# Altium PCB Pneumatics Control Board.PcbDoc
Units mil, origin at the board's own origin, x right, y up, seen from the top; angles counter-clockwise.
Board outline 6000 x 4000 mil, 2 copper layers (Top Layer, Bottom Layer); 14 components, 38 nets, 49 pads, 0 vias.
Unrouted connection lines stored in the file: 11.
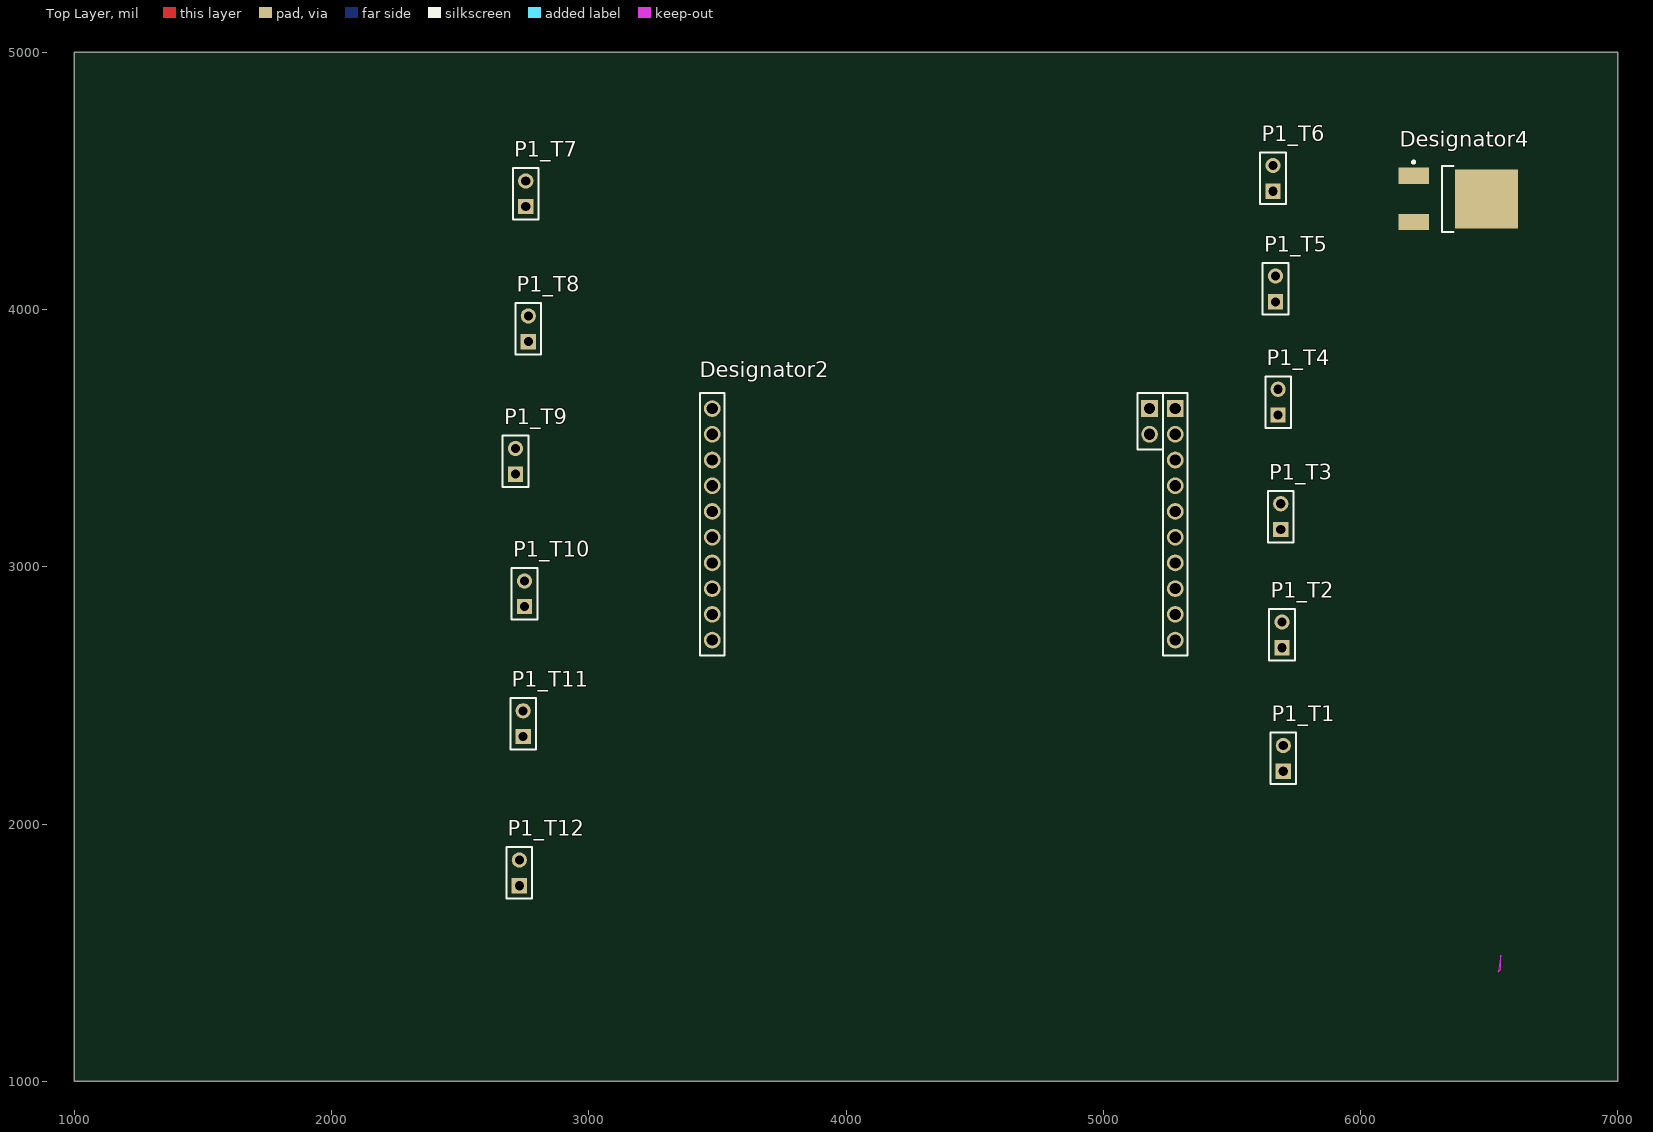
[diagram p0: Top Layer view]
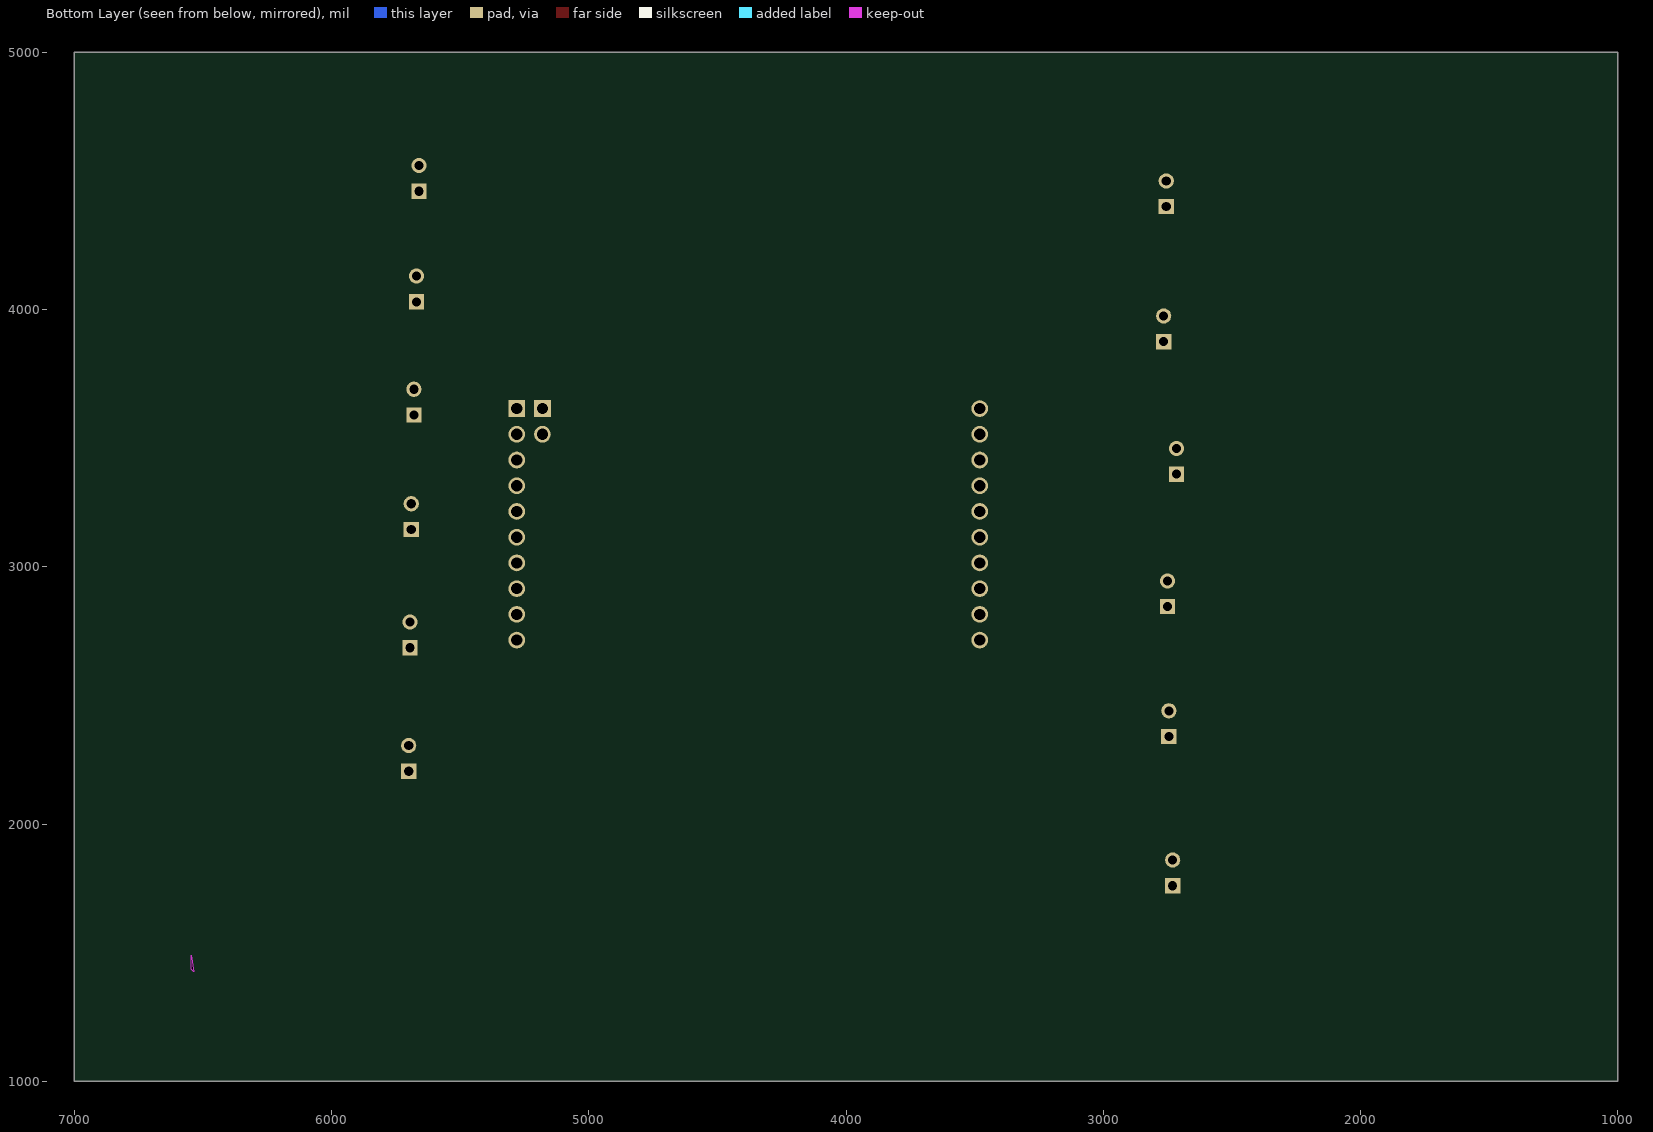
[diagram p1: Bottom Layer view, seen from below]

## Layer stack, top to bottom
Top Solder: solder mask 0.4, Solder Resist, Dk 3.5
Top Layer: signal copper 1.4
Dielectric 1: dielectric 12.6, FR-4, Dk 4.8
Bottom Layer: signal copper 1.4
Bottom Solder: solder mask 0.4, Solder Resist, Dk 3.5

## Board outline
1000,1000 7000,1000 7000,5000 1000,5000
cut-out: 6535,1425 6545,1435 6545,1490

## Design rules (kind name [scope] priority, off if disabled: settings)
Clearance [All] p1: gap=10 ignorepadtopadclearanceinfootprint=FALSE except(0: Arc-Hole Track-Hole SMDPad-Hole THPad-Hole Via-Hole Fill-Hole Poly-Hole Region-Hole Text-Hole)
PolygonConnect [All] p1: connectstyle=Relief reliefconductorwidth=10 reliefentries=4 polygonreliefangle="90 Angle" airgapwidth=10
RoomDefinition T6 [InComponentClass('T6')] p1: confinementstyle=ConfineOut formatcopy=TRUE lockcomponents=FALSE outline 5600,4400 5905,4400 5905,4730 5600,4730
RoomDefinition T12 [InComponentClass('T12')] p2: confinementstyle=ConfineIn formatcopy=TRUE lockcomponents=FALSE outline 2670,1700 3025,1700 3025,2030 2670,2030
RoomDefinition T11 [InComponentClass('T11')] p3: confinementstyle=ConfineIn formatcopy=TRUE lockcomponents=FALSE outline 2685,2280 3020,2280 3020,2610 2685,2610
RoomDefinition T10 [InComponentClass('T10')] p4: confinementstyle=ConfineIn formatcopy=TRUE lockcomponents=FALSE outline 2690,2785 3045,2785 3045,3115 2690,3115
RoomDefinition T9 [InComponentClass('T9')] p5: confinementstyle=ConfineIn formatcopy=TRUE lockcomponents=FALSE outline 2655,3300 2960,3300 2960,3630 2655,3630
RoomDefinition T8 [InComponentClass('T8')] p6: confinementstyle=ConfineIn formatcopy=TRUE lockcomponents=FALSE outline 2705,3815 3010,3815 3010,4145 2705,4145
RoomDefinition T7 [InComponentClass('T7')] p7: confinementstyle=ConfineIn formatcopy=TRUE lockcomponents=FALSE outline 2695,4340 3000,4340 3000,4670 2695,4670
RoomDefinition T5 [InComponentClass('T5')] p8: confinementstyle=ConfineIn formatcopy=TRUE lockcomponents=FALSE outline 5610,3970 5915,3970 5915,4300 5610,4300
RoomDefinition T4 [InComponentClass('T4')] p9: confinementstyle=ConfineIn formatcopy=TRUE lockcomponents=FALSE outline 5620,3530 5925,3530 5925,3860 5620,3860
RoomDefinition T3 [InComponentClass('T3')] p10: confinementstyle=ConfineIn formatcopy=TRUE lockcomponents=FALSE outline 5630,3085 5935,3085 5935,3415 5630,3415
RoomDefinition T2 [InComponentClass('T2')] p11: confinementstyle=ConfineIn formatcopy=TRUE lockcomponents=FALSE outline 5635,2625 5940,2625 5940,2955 5635,2955
RoomDefinition T1 [InComponentClass('T1')] p12: confinementstyle=ConfineIn formatcopy=TRUE lockcomponents=FALSE outline 5640,2145 5925,2145 5925,2475 5640,2475
RoomDefinition "Pneumatics Control Board MSP4302433" [InComponentClass('Pneumatics Control Board MSP4302433')] p13: confinementstyle=ConfineIn formatcopy=TRUE lockcomponents=FALSE outline 1215,0 3215,0 3215,1000 1215,1000
RoutingVias [All] p1: holewidth=28 width=50 viastyle="Through Hole" minholewidth=28 minwidth=50 maxholewidth=28 maxwidth=50
SolderMaskExpansion [All] p1: expansion=4 istentingtop=FALSE
Width [All] p1: maxlimit=10 minlimit=10 preferedwidth=10
30 further rules are at their usual default settings.

## Classes and differential pairs
channel class "Transistor Circuit": T1 T2 T3 T4 T5 T6 T7 T8 T9 T10 T11 T12
component class T12: D1_T12 P1_T12 Q1_T12 R1_T12
component class T11: D1_T11 P1_T11 Q1_T11 R1_T11
component class T10: D1_T10 P1_T10 Q1_T10 R1_T10
component class T9: D1_T9 P1_T9 Q1_T9 R1_T9
component class T8: D1_T8 P1_T8 Q1_T8 R1_T8
component class T7: D1_T7 P1_T7 Q1_T7 R1_T7
component class T6: D1_T6 P1_T6 Q1_T6 R1_T6
component class T5: D1_T5 P1_T5 Q1_T5 R1_T5
component class T4: D1_T4 P1_T4 Q1_T4 R1_T4
component class T3: D1_T3 P1_T3 Q1_T3 R1_T3
component class T2: D1_T2 P1_T2 Q1_T2 R1_T2
component class T1: D1_T1 P1_T1 Q1_T1 R1_T1
component class "Pneumatics Control Board MSP4302433": J3 MSP?

## Components (designator, comment, footprint, x,y, rotation, side; value= is the part's Value field where it differs from the comment)
Designator2 "Comment" "MSP-EXP430G2ET Interface" 5280,3615 r0 top
Designator4 "Comment" ONSC-DPAK-3-369C-01_V 6380,4430 r0 top
P1_T1 "2 Pin Molex .01''" HDR1X2 5700,2205 r90 top (schematic designator P1)
P1_T2 "2 Pin Molex .01''" HDR1X2 5695,2685 r90 top (schematic designator P1)
P1_T3 "2 Pin Molex .01''" HDR1X2 5690,3145 r90 top (schematic designator P1)
P1_T4 "2 Pin Molex .01''" HDR1X2 5680,3590 r90 top (schematic designator P1)
P1_T5 "2 Pin Molex .01''" HDR1X2 5670,4030 r90 top (schematic designator P1)
P1_T6 "2 Pin Molex .01''" HDR1X2 5660,4460 r90 top (schematic designator P1)
P1_T7 "2 Pin Molex .01''" HDR1X2 2755,4400 r90 top (schematic designator P1)
P1_T8 "2 Pin Molex .01''" HDR1X2 2765,3875 r90 top (schematic designator P1)
P1_T9 "2 Pin Molex .01''" HDR1X2 2715,3360 r90 top (schematic designator P1)
P1_T10 "2 Pin Molex .01''" HDR1X2 2750,2845 r90 top (schematic designator P1)
P1_T11 "2 Pin Molex .01''" HDR1X2 2745,2340 r90 top (schematic designator P1)
P1_T12 "2 Pin Molex .01''" HDR1X2 2730,1760 r90 top (schematic designator P1)

## Footprints (in the part's own frame and the unit in brackets; to place one, negate y for a bottom-side part, rotate by r counter-clockwise, add the part's x,y. Pads: shape width x height; smd on the part's side, far side on the other; paste and mask are expansions set on the pad)
HDR1X2 [mm] "Connector; Header; 2 Position"
  rect 1.5x1.5 hole 0.9: 1(0,0)
  round 1.5 hole 0.9: 2(2.54,0)
  silkscreen extent -1.27,-1.27 3.81,1.27
"MSP-EXP430G2ET Interface" [mm] "MSP-EXP430G2ET Interface"
  rect 1.65x1.65 hole 1.1: 1(0,0) 21(-2.54,0)
  round 1.65 hole 1.1: 2(0,-2.54) 3(0,-5.08) 4(0,-7.62) 5(0,-10.16) 6(0,-12.7) 7(0,-15.24) 8(0,-17.78) 9(0,-20.32) 10(0,-22.86) 11(-45.72,-22.86) 12(-45.72,-20.32) 13(-45.72,-17.78) 14(-45.72,-15.24) 15(-45.72,-12.7) 16(-45.72,-10.16) 17(-45.72,-7.62) 18(-45.72,-5.08) 19(-45.72,-2.54) 20(-45.72,0) 22(-2.54,-2.54)
  silkscreen extent -46.92,-24.39 1.2,1.53, body extent -46.92,-24.39 1.2,1.53, height 8.51
ONSC-DPAK-3-369C-01_V [mm] "DPAK, 3-Leads, Body 6.54x6.095mm, Pitch 2.29mm"
  rect 3x1.6 smd: 1(-4.4,2.29) 3(-4.4,-2.29)
  rect 6.2x5.8 smd: 4(2.8,0)
  silkscreen extent -4.52,-3.27 -0.45,3.76, body extent -1.6,-3.27 4.49,3.27, height 2.38

## Part data
P1_T1 P1_T2 P1_T3 P1_T4 P1_T5 P1_T6 P1_T7 P1_T8 P1_T9 P1_T10 P1_T11 P1_T12: library part "Header 2", "Header, 2-Pin", LatestRevisionDate=17-Jul-2002, LatestRevisionNote="Re-released for DXP Platform.", Publisher="Altium Limited"

## Nets (pads, with @x,y where several pads share a name; then routed paths per layer and width w, separated by ;. In a path a pad name is that pad's centre, name@x,y a point inside that pad or via, vN(x,y) a via of type N, cw(c..) or ccw(c..) an arc to the next point about the centre after c; other vN are vias at no path point)
5V: P1_T1.2 P1_T2.2 P1_T3.2 P1_T4.2 P1_T5.2 P1_T6.2 P1_T7.2 P1_T8.2 P1_T9.2 P1_T10.2 P1_T11.2 P1_T12.2
GND: 
NetD1_T1_2: 
NetD1_T2_2: 
NetD1_T3_2: 
NetD1_T4_2: 
NetD1_T5_2: 
NetD1_T6_2: 
NetD1_T7_2: 
NetD1_T8_2: 
NetD1_T9_2: 
NetD1_T10_2: 
NetD1_T11_2: 
NetD1_T12_2: 
NetMSP?_3: 
NetMSP?_4: 
NetMSP?_7: 
NetMSP?_8: 
NetMSP?_9: 
NetMSP?_10: 
NetMSP?_11: 
NetMSP?_13: 
NetMSP?_15: 
NetMSP?_16: 
NetMSP?_21: 
NetMSP?_22: 
NetP1_T1_1: P1_T1.1
NetP1_T2_1: P1_T2.1
NetP1_T3_1: P1_T3.1
NetP1_T4_1: P1_T4.1
NetP1_T5_1: P1_T5.1
NetP1_T6_1: P1_T6.1
NetP1_T7_1: P1_T7.1
NetP1_T8_1: P1_T8.1
NetP1_T9_1: P1_T9.1
NetP1_T10_1: P1_T10.1
NetP1_T11_1: P1_T11.1
NetP1_T12_1: P1_T12.1
pads on no net: Designator2.1 Designator2.2 Designator2.3 Designator2.4 Designator2.5 Designator2.6 Designator2.7 Designator2.8 Designator2.9 Designator2.10 Designator2.11 Designator2.12 Designator2.13 Designator2.14 Designator2.15 Designator2.16 Designator2.17 Designator2.18 Designator2.19 Designator2.20 Designator2.21 Designator2.22 Designator4.1 Designator4.3 Designator4.4